# Altium PCB HLK-AX3000-KIT.PcbDoc (part 2 of 3)
Units mm, origin at the board's own origin, x right, y up, seen from the top; angles counter-clockwise.
Board outline 152 x 109 mm, 2 copper layers (Top Layer, Bottom Layer), stack 0.325 mm thick; 227 components, 273 nets, 847 pads, 829 vias.
Unrouted connection lines stored in the file: 195.
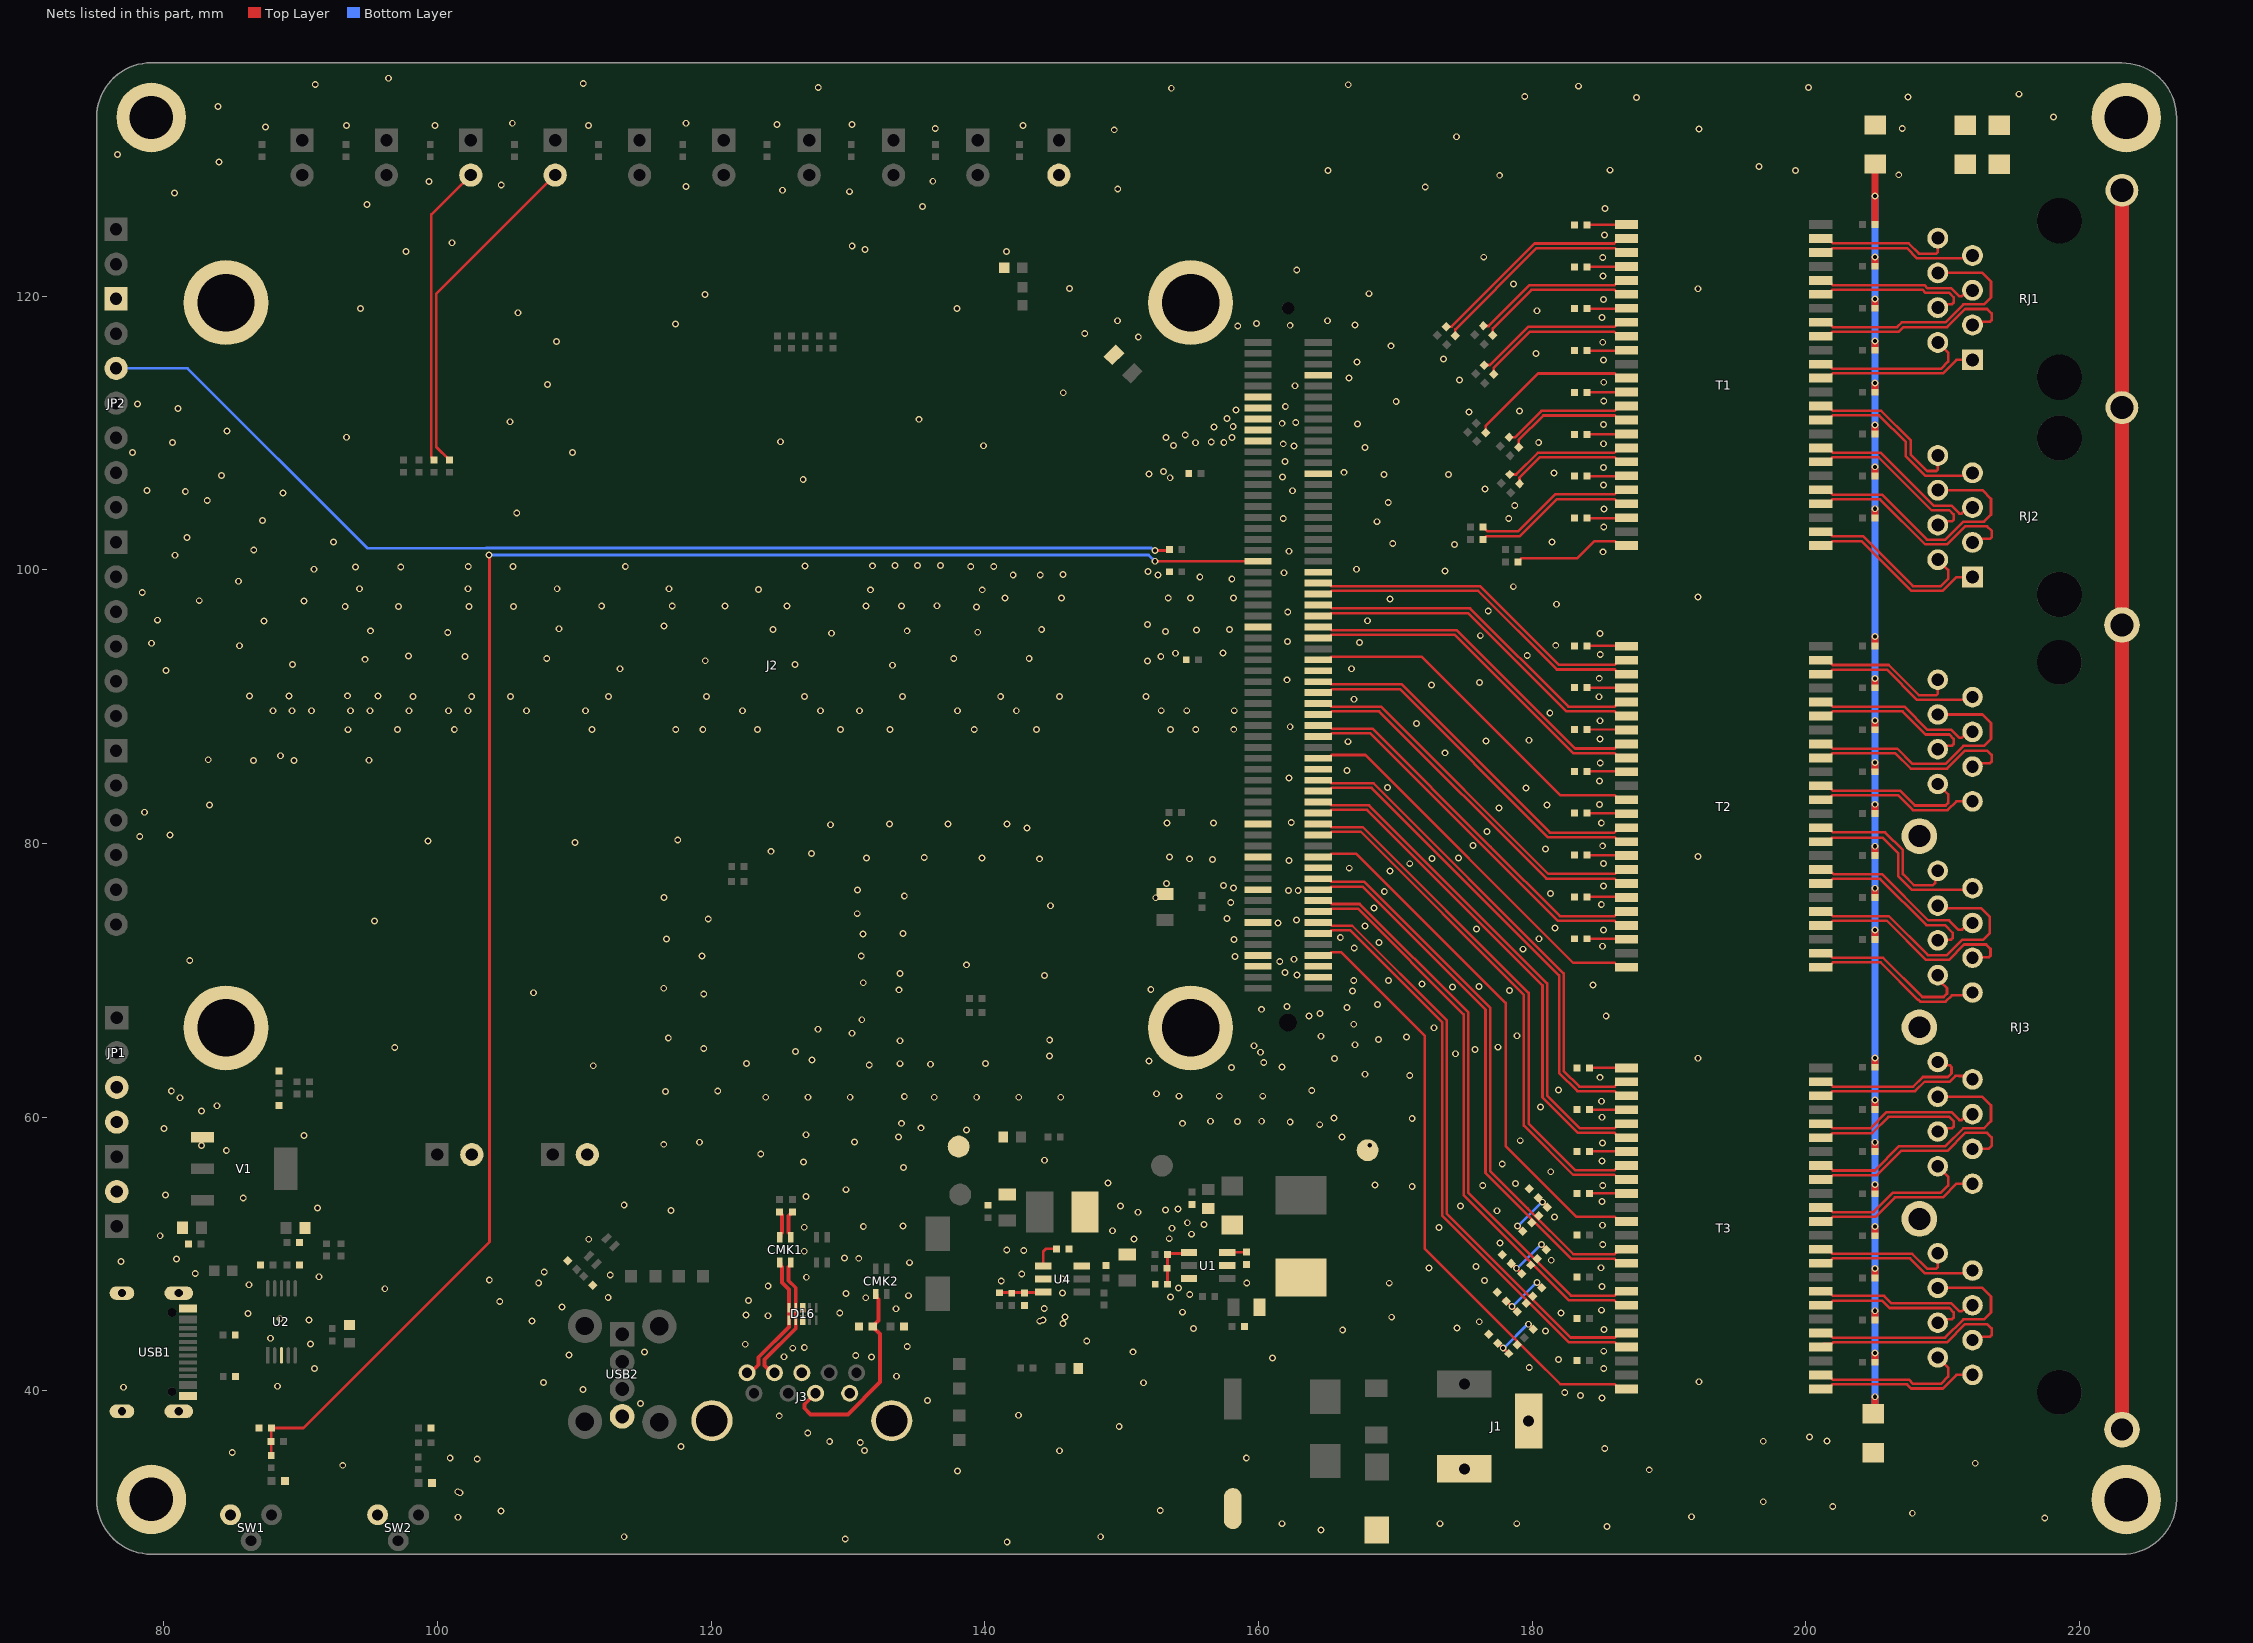
[diagram p2: the nets of this part, all layers, seen from the top]

## Via types
v1: diameter 0.5, hole 0.3, Top Layer to Bottom Layer, tented both sides, 829 vias

## Nets (pads, with @x,y where several pads share a name; then routed paths per layer and width w, separated by ;. In a path a pad name is that pad's centre, name@x,y a point inside that pad or via, vN(x,y) a via of type N, cw(c..) or ccw(c..) an arc to the next point about the centre after c; other vN are vias at no path point) (continued)
ESW_TXVN_B_P0: J2.107 R68.1 T3.20 | length 43.5
  Top Layer w0.188: J2.107@164.357,74.223 165.107,74.223 165.344,73.986 166.849,73.986 173.753,67.083 173.753,52.941 182.799,43.895 186.033,43.895 186.357,44.219 T3.20@186.887,44.219
ESW_TXVN_B_P1: J2.89 T3.8 | length 38.7
  Top Layer w0.188: J2.89@164.357,81.423 165.107,81.423 165.334,81.196 167.615,81.196 179.737,69.074 179.737,59.524 183.132,56.129 186.027,56.129 186.357,56.459 T3.8@186.887,56.459
ESW_TXVN_B_P2: J2.71 T2.20 | length 28.5
  Top Layer w0.188: J2.71@164.357,88.623 165.107,88.623 165.339,88.391 168.319,88.391 176.962,79.749 182.025,74.686 186.021,74.686 186.131,74.796 186.131,74.808 186.357,75.034 T2.20@186.887,75.034
ESW_TXVN_B_P3: J2.53 T2.8 | length 26.3
  Top Layer w0.188: J2.53@164.357,95.823 165.107,95.823 165.351,95.579 174.49,95.579 183.131,86.939 186.022,86.939 186.357,87.274 T2.8@186.887,87.274
ESW_TXVN_B_P4: R86.2 T1.20 | length 11.9
  Top Layer w0.188: R86.2@176.393,103.132 176.72,102.805 178.961,102.805 181.686,105.531 186.039,105.531 186.357,105.849 T1.20@186.887,105.849
ESW_TXVN_B_P5: R78.2 T1.8 | length 11.7
  Top Layer w0.188: R78.2@176.508,114.966 176.913,114.966 179.696,117.749 186.021,117.749 186.131,117.859 186.131,117.863 186.357,118.089 T1.8@186.887,118.089
ESW_TXVN_C_P0: J2.103 R66.1 T3.17 | length 42.3
  Top Layer w0.188: J2.103@164.357,75.823 165.107,75.823 165.354,75.576 167.393,75.576 175.328,67.641 175.328,54.459 180.237,49.549 182.835,46.951 186.029,46.951 186.357,47.279 T3.17@186.887,47.279
ESW_TXVN_C_P1: J2.85 T3.5 | length 37.3
  Top Layer w0.188: J2.85@164.357,83.023 165.107,83.023 165.34,82.79 168.078,82.79 181.093,69.775 181.093,61.582 183.49,59.186 186.024,59.186 186.357,59.519 T3.5@186.887,59.519
ESW_TXVN_C_P2: J2.67 T2.17 | length 27.8
  Top Layer w0.188: J2.67@164.357,90.223 165.107,90.223 165.334,89.996 168.948,89.996 181.173,77.771 186.034,77.771 186.357,78.094 T2.17@186.887,78.094
ESW_TXVN_C_P3: J2.49 T2.5 | length 25.8
  Top Layer w0.188: J2.49@164.357,97.423 165.107,97.423 165.351,97.179 175.456,97.179 182.641,89.994 186.021,89.994 186.131,90.104 186.131,90.108 186.357,90.334 T2.5@186.887,90.334
ESW_TXVN_C_P4: R84.2 T1.17 | length 9.3
  Top Layer w0.188: R84.2@178.365,106.965 178.818,106.965 180.406,108.553 186.001,108.553 186.357,108.909 T1.17@186.887,108.909
ESW_TXVN_C_P5: R76.2 T1.5 | length 11.8
  Top Layer w0.188: R76.2@176.439,117.818 176.654,117.818 176.66,117.823 176.663,117.82 176.819,117.82 179.804,120.805 186.021,120.805 186.131,120.915 186.131,120.923 186.357,121.149 T1.5@186.887,121.149
ESW_TXVN_D_P0: J2.99 R64.1 T3.14 | length 41
  Top Layer w0.188: J2.99@164.357,77.423 165.107,77.423 165.338,77.192 167.733,77.192 176.928,67.997 176.928,56.058 179.661,53.325 182.999,49.987 186.021,49.987 186.131,50.097 186.131,50.113 186.357,50.339 T3.14@186.887,50.339
ESW_TXVN_D_P1: J2.81 T3.2 | length 36.1
  Top Layer w0.188: J2.81@164.357,84.623 165.107,84.623 165.33,84.4 168.399,84.4 182.302,70.496 182.302,63.376 183.442,62.236 186.014,62.236 186.357,62.579 T3.2@186.887,62.579
ESW_TXVN_D_P2: J2.63 T2.14 | length 27.2
  Top Layer w0.188: J2.63@164.357,91.823 165.107,91.823 165.306,91.624 170.47,91.624 181.296,80.798 186.001,80.798 186.357,81.154 T2.14@186.887,81.154
ESW_TXVN_D_P3: J2.45 T2.2 | length 25.1
  Top Layer w0.188: J2.45@164.357,99.023 165.107,99.023 165.328,98.802 176.196,98.802 181.945,93.054 186.021,93.054 186.131,93.164 186.131,93.168 186.357,93.394 T2.2@186.887,93.394
ESW_TXVN_D_P4: R82.2 T1.14 | length 9.5
  Top Layer w0.188: R82.2@178.304,109.672 178.519,109.672 178.524,109.677 178.53,109.672 178.731,109.672 180.675,111.616 186.021,111.616 186.131,111.727 186.131,111.743 186.357,111.969 T1.14@186.887,111.969
ESW_TXVN_D_P5: R74.2 T1.2 | length 15.8
  Top Layer w0.188: R74.2@173.708,117.776 174.108,117.776 180.176,123.844 185.99,123.844 186.129,123.983 186.661,123.983 T1.2@186.887,124.209
ESW_TXVP_A_P0: J2.113 R71.2 T3.24 | length 45
  Top Layer w0.188: J2.113@164.357,71.823 165.107,71.823 165.329,72.046 166.048,72.046 172.142,65.951 172.142,50.387 180.07,42.459 182.048,40.481 186.015,40.481 186.357,40.139 T3.24@186.887,40.139
ESW_TXVP_A_P1: J2.95 T3.12 | length 39.9
  Top Layer w0.188: J2.95@164.357,79.023 165.107,79.023 165.33,79.246 167.153,79.246 178.05,68.349 178.05,57.881 183.206,52.725 186.021,52.725 186.131,52.615 186.131,52.605 186.357,52.379 T3.12@186.887,52.379
ESW_TXVP_A_P2: J2.77 T2.24 | length 29.1
  Top Layer w0.188: J2.77@164.357,86.223 165.107,86.223 165.346,86.463 167.809,86.463 182.991,71.281 186.03,71.281 186.357,70.954 T2.24@186.887,70.954
ESW_TXVP_A_P3: J2.59 T2.12 | length 27
  Top Layer w0.188: J2.59@164.357,93.423 165.107,93.423 165.337,93.653 171.922,93.653 182.045,83.53 186.021,83.53 186.357,83.194 T2.12@186.887,83.194
ESW_TXVP_A_P4: R89.2 T1.24 | length 8.7
  Top Layer w0.188: R89.2@178.956,100.577 179.112,100.733 179.228,100.849 183.293,100.849 184.519,102.076 186.051,102.076 186.357,101.769 T1.24@186.887,101.769
ESW_TXVP_A_P5: R81.2 T1.12 | length 12.5
  Top Layer w0.188: R81.2@176.594,110.02 176.594,110.512 180.427,114.345 186.022,114.345 186.357,114.009 T1.12@186.887,114.009
ESW_TXVP_B_P0: J2.109 R69.2 T3.21 | length 43.5
  Top Layer w0.188: J2.109@164.357,73.423 165.107,73.423 165.33,73.646 166.708,73.646 173.412,66.942 173.412,52.8 182.658,43.555 186.002,43.555 186.357,43.199 T3.21@186.887,43.199
ESW_TXVP_B_P1: J2.91 T3.9 | length 38.7
  Top Layer w0.188: J2.91@164.357,80.623 165.107,80.623 165.34,80.856 167.474,80.856 179.397,68.933 179.397,59.383 182.991,55.788 186.008,55.788 186.357,55.439 T3.9@186.887,55.439
ESW_TXVP_B_P2: J2.73 T2.21 | length 28.4
  Top Layer w0.188: J2.73@164.357,87.823 165.107,87.823 165.334,88.051 168.178,88.051 181.884,74.345 186.026,74.345 186.357,74.014 T2.21@186.887,74.014
ESW_TXVP_B_P3: J2.55 T2.9 | length 26.3
  Top Layer w0.188: J2.55@164.357,95.023 165.107,95.023 165.323,95.239 174.349,95.239 182.99,86.598 186.021,86.598 186.131,86.488 186.131,86.48 186.357,86.254 T2.9@186.887,86.254
ESW_TXVP_B_P4: R87.2 T1.21 | length 11.9
  Top Layer w0.188: R87.2@176.393,102.21 176.648,102.465 179.102,102.465 181.804,105.167 186.02,105.167 186.357,104.829 T1.21@186.887,104.829
ESW_TXVP_B_P5: R79.2 T1.9 | length 11.4
  Top Layer w0.188: R79.2@177.176,114.284 177.176,114.748 179.837,117.409 185.985,117.409 186.099,117.295 186.661,117.295 T1.9@186.887,117.069
ESW_TXVP_C_P0: J2.105 R67.2 T3.18 | length 42.3
  Top Layer w0.188: J2.105@164.357,75.023 165.107,75.023 165.32,75.236 167.252,75.236 174.987,67.501 174.987,54.318 182.694,46.611 186.006,46.611 186.357,46.259 T3.18@186.887,46.259
ESW_TXVP_C_P1: J2.87 T3.6 | length 37.3
  Top Layer w0.188: J2.87@164.357,82.223 165.107,82.223 165.333,82.45 167.937,82.45 180.753,69.634 180.753,61.441 183.349,58.846 186.011,58.846 186.357,58.499 T3.6@186.887,58.499
ESW_TXVP_C_P2: J2.69 T2.18 | length 27.8
  Top Layer w0.188: J2.69@164.357,89.423 165.107,89.423 165.34,89.656 168.807,89.656 181.032,77.431 186.001,77.431 186.357,77.074 T2.18@186.887,77.074
ESW_TXVP_C_P3: J2.51 T2.6 | length 25.7
  Top Layer w0.188: J2.51@164.357,96.623 165.107,96.623 165.322,96.839 175.315,96.839 182.5,89.653 186.018,89.653 186.357,89.314 T2.6@186.887,89.314
ESW_TXVP_C_P4: R85.2 T1.18 | length 9
  Top Layer w0.188: R85.2@179.072,106.274 179.072,106.737 180.547,108.213 186.034,108.213 186.357,107.889 T1.18@186.887,107.889
ESW_TXVP_C_P5: R77.2 T1.6 | length 11.6
  Top Layer w0.188: R77.2@177.124,117.127 177.124,117.644 179.945,120.464 186.022,120.464 186.357,120.129 T1.6@186.887,120.129
ESW_TXVP_D_P0: J2.101 R65.2 T3.15 | length 41
  Top Layer w0.188: J2.101@164.357,76.623 165.107,76.623 165.335,76.851 167.592,76.851 176.587,67.856 176.587,55.917 180.07,52.435 182.858,49.646 186.03,49.646 186.357,49.319 T3.15@186.887,49.319
ESW_TXVP_D_P1: J2.83 T3.3 | length 36.1
  Top Layer w0.188: J2.83@164.357,83.823 165.107,83.823 165.343,84.059 168.258,84.059 181.962,70.355 181.962,63.235 183.301,61.896 186.021,61.896 186.357,61.559 T3.3@186.887,61.559
ESW_TXVP_D_P2: J2.65 T2.15 | length 27.3
  Top Layer w0.188: J2.65@164.357,91.023 165.107,91.023 165.368,91.284 170.329,91.284 181.165,80.448 186.044,80.448 186.357,80.134 T2.15@186.887,80.134
ESW_TXVP_D_P3: J2.47 T2.3 | length 25.2
  Top Layer w0.188: J2.47@164.357,98.223 165.107,98.223 165.345,98.462 176.055,98.462 181.804,92.713 186.021,92.713 186.131,92.603 186.131,92.6 186.357,92.374 T2.3@186.887,92.374
ESW_TXVP_D_P4: R83.2 T1.15 | length 9.3
  Top Layer w0.188: R83.2@179.014,108.965 179.014,109.473 180.816,111.276 186.031,111.276 186.357,110.949 T1.15@186.887,110.949
ESW_TXVP_D_P5: R75.2 T1.3 | length 15.6
  Top Layer w0.188: R75.2@174.391,117.093 174.391,117.577 180.317,123.504 186.043,123.504 186.357,123.189 T1.3@186.887,123.189
GBE_LED0: D13.2 R24.1 | length 22.1
  Top Layer w0.2: R24.1@99.751,108.027 99.548,108.231 99.548,125.963 D13.2@102.432,128.847
GBE_LED1: D11.2 R22.1 | length 24.8
  Top Layer w0.2: R22.1@100.867,108.027 99.9,108.995 99.9,120.151 D11.2@108.596,128.847
GND: C2.1 C3.2 C4.1 C5.2 C6.1 C7.1 C9.1 C10.2 C11.1 C12.1 C13.2 C14.1 C16.2 C17.2 C18.1 C19.2 C20.2 C21.2 C22.2 C24.1 C25.2 C26.1 C28.2 C30.1 C34.2 C35.1 C36.1 C37.1 C38.1 C39.1 C40.1 C41.1 C42.1 C43.1 C44.1 C45.1 C46.1 C47.1 C48.1 C49.1 C50.1 C51.1 C52.1 C53.1 C54.1 C55.1 C56.1 C57.1 C58.1 C59.1 C60.2 D2.1 D4.2 D7.1 D12.1 D16.3 D16.8 D17.1 D18.1 D19.1 D20.1 D21.1 D22.1 J1.2 J1.3 J2.0 J2.7 J2.12 J2.14 J2.16 J2.18 J2.20 J2.25 J2.43 J2.54 J2.61 J2.79 J2.90 J2.96 J2.97 J2.102 J2.108 J2.114 J2.115 J2.116 J2.117 J3.4 J3.7 J3.10 J3.11 J5.1 J6.1 J7.1 J8.1 JP1.3 JP2.1 JP5.2 JP6.2 JP8.2 JP9.2 LED1.2 LED2.2 LED3.2 R5.2 R6.1 R12.2 R21.1 R27.1 R28.1 R44.1 R90.1 R100.2 SW1.1 SW2.1 TP6.1 TP10.1 U1.3 U2.3 U4.2 USB1.1 USB1.2 USB1.3 USB1.4 USB1.A1B12 USB1.B1A12 USB2.4 V1.1
  other v1: 141.63,28.956 129.794,29.159 113.64,29.337 148.463,29.337 164.573,29.831 185.477,30.085 161.703,30.288 173.26,30.288 178.873,30.288 217.456,30.695 101.498,30.759 191.65,30.796 207.779,31.05 104.648,31.217 152.813,31.253 201.962,31.533 196.882,31.888 101.635,32.549 101.48,32.625 138.005,34.149 188.551,34.225 93.072,34.555 212.376,34.708 102.905,35.012 159.106,35.077 100.924,35.089 84.995,35.495 131.204,35.631 145.447,35.622 185.3,35.775 117.786,35.927 130.894,36.215 128.659,36.292 196.887,36.316 201.535,36.341 200.265,36.621 127.059,36.927 149.816,37.4 124.976,38.171 142.45,38.213 114.828,39.065 135.814,39.294 185.101,39.465 183.525,39.668 182.376,39.877 110.642,40.107 77.038,40.259 88.316,40.335 151.587,40.589 107.747,40.615 192.188,40.659 133.536,41.067 91.008,41.631 185.228,41.624 179.781,41.707 181.915,42.291 161.011,42.393 131.706,42.464 125.332,42.489 130.564,42.591 109.601,42.621 115.12,42.836 150.825,42.85 185.228,42.894 125.96,43.115 126.805,43.175 134.323,43.226 90.703,43.409 122.487,43.404 147.441,43.641 87.782,43.84 180.975,44.374 166.148,44.436 185.247,44.484 155.245,44.552 174.505,44.588 145.714,44.911 176.13,45.046 106.909,45.11 144.012,45.089 90.602,45.187 144.241,45.165 88.494,45.263 169.729,45.381 145.867,45.393 124.138,45.486 122.538,45.537 86.157,45.644 129.396,45.69 182.093,45.695 154.432,45.745 185.076,45.892 133.5,46 144.343,46.003 109.093,46.126 104.546,46.533 122.715,46.604 112.471,46.812 131.294,46.798 153.568,46.867 134.418,46.951 154.972,47.047 129.846,47.103 145.663,47.146 96.146,47.458 154.159,47.504 185.101,47.619 124.163,47.671 86.233,47.752 107.391,47.879 169.552,47.865 159.138,47.885 141.193,48.035 176.505,48.057 103.784,48.108 145.673,48.163 126.951,48.297 91.338,48.336 112.624,48.463 82.296,48.565 142.692,48.543 107.798,48.692 172.447,48.983 185.025,48.99 175.902,49.084 134.494,49.364 76.86,49.454 181.388,49.541 80.924,49.632 130.785,49.682 129.751,49.703 126.798,50.202 142.844,50.245 141.599,50.296 185.152,50.692 177.648,50.8 111.049,51.079 150.908,51.091 153.473,51.116 79.731,51.333 155.099,51.446 149.333,51.7 153.677,51.878 173.184,51.929 126.798,51.954 131.116,52.005 134.012,52.056 185.147,52.098 156.013,52.158 154.794,52.285 181.617,52.691 151.187,53.047 177.419,53.162 117.069,53.188 153.194,53.224 154.108,53.275 91.237,53.365 149.917,53.504 174.759,53.504 113.64,53.569 185.101,53.842 85.801,54.102 126.925,54.19 80.112,54.305 129.846,54.698 171.228,54.926 176.384,55.002 185.152,55.01 168.51,55.028 178.791,55.143 149.003,55.18 181.356,56.007 134.063,56.323 177.807,56.577 126.746,56.718 185.101,56.788 144.348,56.845 123.623,57.314 84.563,57.568 82.76,57.923 168.129,57.949 116.535,58.014 185.127,58.109 119.151,58.166 130.481,58.177 179.127,58.279 133.68,58.547 166.091,58.547 90.246,58.649 126.925,58.711 138.665,59.066 80.017,59.168 135.338,59.219 164.472,59.447 133.91,59.549 154.439,59.549 162.313,59.651 158.452,59.676 156.496,59.701 160.23,59.701 171.228,59.905 165.506,59.944 185.101,59.989 82.753,60.452 180.601,60.743 83.871,60.833 185.076,61.157 81.178,61.417 123.984,61.454 127.083,61.454 130.156,61.454 136.303,61.454 139.402,61.454 142.475,61.454 145.549,61.454 134.112,61.519 154.185,61.53 157.131,61.53 160.306,61.53 152.534,61.708 116.662,61.874 80.543,61.9 120.479,61.911 163.887,61.937 181.921,61.987 184.949,62.91 171.05,63.054 167.774,63.13 158.02,63.638 161.703,63.664 111.379,63.754 131.553,63.816 136.024,63.867 133.807,63.906 122.587,63.918 140.037,63.918 160.382,63.994 152,64.096 127.356,64.186 165.538,64.273 192.112,64.307 144.71,64.477 174.403,64.629 160.147,64.745 126.168,64.807 175.825,64.934 119.456,65.024 96.876,65.1 177.502,65.112 159.671,65.213 167.037,65.289 133.807,65.583 144.736,65.645 168.764,65.67 116.865,65.786 170.822,65.848 164.567,65.913 178.899,65.95 130.283,66.128 127.813,66.421 172.828,66.534 166.961,66.788 131.007,67.121 185.406,67.38 163.684,67.398 164.497,67.575 160.204,67.88 166.453,68.007 162.084,68.083 168.688,68.236 119.456,68.986 107.01,69.088 166.859,69.226 178.34,69.252 133.724,69.305 152.127,69.328 116.535,69.418 174.174,69.506 176.105,69.557 184.436,69.658 171.939,69.734 131.115,69.825 166.961,69.988 169.501,69.988 144.355,70.344 162.821,70.395 133.807,70.485 161.932,70.573 138.665,71.131 161.551,71.385 81.89,71.45 162.592,71.538 158.274,71.741 119.336,71.766 130.962,71.78 179.331,72.274 166.995,72.351 185.127,72.485 168.815,72.757 158.198,72.986 116.738,73.025 180.499,73.036 165.976,73.119 131.089,73.381 134.01,73.431 185.203,73.679 175.927,73.748 181.667,73.824 167.774,73.976 161.424,74.179 95.402,74.346 162.77,74.408 119.786,74.473 157.69,74.51 130.676,74.868 168.448,75.282 144.787,75.449 185.05,75.533 157.969,75.678 116.561,76.048 152.483,76.034 134.112,76.149 181.342,76.346 169.191,76.498 162.186,76.567 162.897,76.567 130.683,76.606 158.172,76.744 185.203,76.88 157.436,76.923 153.27,77.075 169.615,77.976 166.631,78.193 171.05,78.523 185.203,78.531 162.236,78.751 156.623,78.828 143.999,78.878 154.947,78.878 172.676,78.904 131.35,78.929 139.783,78.929 174.606,78.929 135.566,78.98 153.499,79.005 192.112,79.039 127.337,79.259 124.358,79.426 180.982,79.59 185.15,79.828 175.673,79.844 110.039,80.072 99.295,80.174 117.558,80.25 78.239,80.504 80.448,80.631 176.689,80.885 143.085,81.139 128.708,81.368 133.026,81.418 137.294,81.418 141.612,81.418 153.321,81.495 156.699,81.495 185.05,81.502 162.389,81.52 78.594,82.282 177.578,82.587 83.344,82.815 181.083,82.815 184.923,82.849 179.534,84.06 169.425,84.085 184.923,84.576 162.236,84.797 166.453,85.33 184.974,85.871 86.538,86.055 89.51,86.055 94.996,86.081 83.242,86.117 88.519,86.411 173.616,86.625 166.529,87.438 176.613,87.489 179.762,87.54 184.949,87.624 93.447,88.316 97.084,88.331 101.226,88.327 111.284,88.327 117.405,88.327 119.387,88.327 123.374,88.327 129.445,88.327 133.077,88.327 139.224,88.327 143.771,88.327 153.577,88.32 155.41,88.332 158.187,88.343 162.313,88.53 171.533,88.759 184.949,88.97 181.286,89.546 87.967,89.699 89.364,89.699 90.786,89.699 93.631,89.699 95.053,89.699 97.924,89.699 100.794,89.699 102.216,89.699 106.509,89.699 110.801,89.699 122.282,89.699 127.997,89.699 130.842,89.699 138.005,89.699 142.297,89.699 152.886,89.703 154.753,89.703 158.222,89.703 166.986,90.537 184.873,90.723 98.203,90.74 102.496,90.74 105.34,90.74 112.503,90.74 119.666,90.74 126.829,90.74 133.992,90.74 141.154,90.74 145.447,90.74 151.773,90.737 86.265,90.766 89.135,90.766 95.638,90.766 93.428,90.791 172.65,91.578 176.156,91.756 162.084,91.959 184.898,92.069 80.144,92.645 113.341,92.772 166.783,92.772 133.255,93.026 89.408,93.091 126.118,93.077 151.873,93.331 119.564,93.356 94.698,93.458 107.982,93.509 137.725,93.509 143.237,93.509 102.013,93.661 152.857,93.675 97.873,93.712 179.635,93.737 184.974,93.821 153.924,93.904 157.404,93.929 85.528,94.449 181.723,94.482 79.104,94.635 167.367,94.677 162.109,94.753 176.206,95.185 184.949,95.345 128.785,95.363 100.743,95.414 139.478,95.439 153.194,95.49 95.104,95.541 134.322,95.541 155.455,95.592 124.517,95.642 144.152,95.642 157.868,95.642 108.871,95.693 116.542,95.896 151.873,95.998 87.313,96.268 167.951,96.277 79.531,96.317 162.135,96.912 176.791,96.989 139.391,97.286 93.25,97.319 97.136,97.319 102.292,97.319 105.544,97.319 111.995,97.344 117.151,97.344 121.012,97.344 125.533,97.344 131.325,97.344 133.915,97.344 136.506,97.37 181.774,97.479 90.253,97.725 82.582,97.743 169.602,97.878 141.459,97.928 145.6,97.934 153.397,97.928 155.023,97.928 158.172,97.928 192.112,98.012 78.416,98.335 131.629,98.538 139.808,98.538 123.451,98.563 94.291,98.614 102.216,98.614 108.744,98.614 116.923,98.614 178.619,98.767 85.442,99.161 158.047,99.335 155.709,99.478 152.657,99.613 142.069,99.63 144.05,99.63 145.701,99.656 161.855,99.783 151.924,99.884 173.616,99.91 90.964,100.037 167.164,100.037 94.012,100.214 97.314,100.214 102.242,100.24 105.518,100.24 113.722,100.24 138.97,100.24 140.646,100.24 126.854,100.265 131.782,100.291 133.433,100.316 135.084,100.316 136.76,100.316 80.801,101.067 185.177,101.314 162.236,101.357 86.57,101.459 174.32,101.854 169.806,101.916 92.386,102.043 181.439,102.043 81.686,102.362 185.228,103.118 168.663,103.516 87.205,103.593 161.805,103.745 178.283,103.759 105.791,104.14 185.254,104.439 178.725,104.695 169.475,104.913 83.166,105.066 88.703,105.625 81.566,105.726 162.49,105.777 78.772,105.802 176.555,105.893 185.203,106.191 126.721,106.604 153.543,106.731 161.754,106.793 84.208,106.895 169.171,106.971 173.87,106.971 151.994,107.01 181.596,107.08 166.25,107.123 153.042,107.174 185.203,107.487 161.932,107.911 77.705,108.571 109.862,108.571 167.774,108.927 139.903,109.068 162.592,109.054 153.778,109.079 161.805,109.206 185.214,109.208 155.404,109.282 80.626,109.308 157.461,109.308 180.474,109.308 156.547,109.333 125.076,109.358 153.245,109.663 158.071,109.663 93.352,109.689 154.642,109.841 84.614,110.146 156.75,110.425 158.147,110.476 185.203,110.611 167.24,110.654 161.728,110.705 162.719,110.755 105.283,110.82 135.179,110.998 157.69,111.06 175.387,111.531 179.07,111.608 158.35,111.67 81.033,111.797 161.957,111.924 78.061,112.127 170.06,112.305 185.228,112.338 145.726,112.94 162.668,113.448 108.033,113.549 185.228,113.71 174.682,113.88 166.605,114.007 167.189,115.175 185.203,115.335 173.507,115.418 180.27,115.81 169.679,116.369 185.152,116.631 108.693,116.674 151.213,117.004 147.301,117.258 158.477,117.817 162.313,117.867 167.037,117.893 117.38,117.969 159.849,117.994 149.689,118.198 165.03,118.198 185.101,118.434 105.874,118.782 180.347,118.934 94.361,119.101 137.973,119.101 185.203,119.755 119.539,120.128 168.078,120.179 192.112,120.542 146.184,120.56 178.645,120.89 185.177,121.482 162.795,121.906 185.152,122.828 176.46,122.846 97.688,123.266 141.569,123.257 131.246,123.42 130.302,123.673 101.067,123.901 185.279,124.479 185.33,126.41 135.439,126.554 94.844,126.695 80.779,127.545 130.103,127.633 125.201,127.734 149.712,127.836 172.187,127.965 118.165,128.014 104.652,128.115 99.369,128.369 136.195,128.397 177.622,128.829 206.788,128.866 165.075,129.184 199.244,129.17 185.685,129.204 196.577,129.475 84.03,129.805 76.613,130.339 174.473,131.648 149.458,132.154 192.188,132.226 136.377,132.256 207.042,132.244 87.431,132.357 93.349,132.459 99.826,132.459 111.028,132.459 142.778,132.459 124.82,132.535 130.281,132.535 105.465,132.637 118.165,132.637 218.091,133.082 83.954,133.869 187.616,134.512 207.474,134.555 179.451,134.595 215.576,134.758 153.626,135.19 127.819,135.241 200.184,135.241 183.395,135.343 166.554,135.444 91.066,135.47 110.649,135.546 96.425,135.927
GND_EARTH: C40.2 R44.2 RJ1.0 RJ2.0 RJ3.EH | length 90.6
  Top Layer w1: RJ3.EH@223.1,37.162 RJ3.EH@223.1,95.972 RJ1.0@223.1,111.852 RJ1.0@223.1,127.732
GPIO_RESET: C26.2 J2.42 R16.2 R19.2 | length 130.2
  Top Layer w0.2: R19.2@87.85,35.271 87.85,36.285 87.85,37.338 C26.2@87.905,37.393 ; C26.2@88.011,37.287 90.195,37.287 103.797,50.889 103.797,101.048 v1(103.763,101.083) ; v1(152.426,100.623) J2.42@159.957,100.623
  Bottom Layer w0.2: v1(103.763,101.083) 151.967,101.083 v1(152.426,100.623)
GPIO_WPS: JP2.3 R18.1 | length 82.4
  Top Layer w0.2: v1(152.426,101.419) 152.435,101.41 R18.1@153.391,101.41
  Bottom Layer w0.2: JP2.3@76.508,114.721 81.732,114.721 94.876,101.577 103.547,101.577 103.555,101.585 152.179,101.585 152.345,101.419 v1(152.426,101.419)
MTXVN_A_P0: RJ3.A2 T3.26 | length 11.4
  Top Layer w0.188: T3.26@201.087,41.159 201.617,41.159 201.843,40.933 201.843,40.92 201.953,40.81 207.531,40.81 207.83,40.511 209.868,40.511 210.389,41.032 210.389,41.688 209.922,42.155 RJ3.A2@209.922,42.437
MTXVN_A_P1: RJ3.B2 T3.38 | length 11.8
  Top Layer w0.188: T3.38@201.087,53.399 201.617,53.399 201.962,53.054 204.94,53.054 206.366,54.481 209.868,54.481 210.389,55.002 210.389,55.658 209.922,56.125 RJ3.B2@209.922,56.407
MTXVN_A_P2: RJ3.C2 T2.26 | length 12
  Top Layer w0.188: T2.26@201.087,71.974 201.617,71.974 201.944,71.647 205.65,71.647 208.515,68.782 210.064,68.782 210.311,69.029 210.311,69.425 209.844,69.892 RJ3.C2@209.844,70.174
MTXVN_A_P3: RJ3.D2 T2.38 | length 11.6
  Top Layer w0.188: T2.38@201.087,84.214 201.617,84.214 201.843,83.988 201.843,83.978 201.953,83.868 206.866,83.868 207.961,82.772 210.219,82.772 210.389,82.942 210.389,83.598 209.922,84.065 RJ3.D2@209.922,84.347
MTXVN_A_P4: RJ2.2 T1.26 | length 12.8
  Top Layer w0.188: T1.26@201.087,102.789 201.617,102.789 201.843,102.563 201.843,102.547 201.953,102.437 204.204,102.437 207.83,98.811 209.868,98.811 210.389,99.332 210.389,99.988 209.922,100.455 RJ2.2@209.922,100.737
MTXVN_A_P5: RJ1.2 T1.38 | length 11.3
  Top Layer w0.188: T1.38@201.087,115.029 201.617,115.029 201.843,114.803 201.843,114.801 201.953,114.691 209.868,114.691 210.389,115.212 210.389,115.868 209.922,116.335 RJ1.2@209.922,116.617
MTXVN_B_P0: RJ3.A6 T3.29 | length 18.7
  Top Layer w0.188: T3.29@201.087,44.219 201.617,44.219 201.95,43.886 210.17,43.886 211.502,45.219 213.016,45.219 213.531,45.734 213.531,46.888 212.902,47.517 RJ3.A6@209.64,47.517
MTXVN_B_P1: RJ3.B6 T3.41 | length 19.4
  Top Layer w0.188: T3.41@201.087,56.459 201.617,56.459 201.974,56.102 205.041,56.102 206.818,57.879 210.192,57.879 211.502,59.189 213.016,59.189 213.531,59.704 213.531,60.858 212.902,61.487 RJ3.B6@209.64,61.487
MTXVN_B_P2: RJ3.C6 T2.29 | length 19.7
  Top Layer w0.188: T2.29@201.087,75.034 201.617,75.034 201.843,74.808 201.843,74.803 201.953,74.693 206.057,74.693 208.911,71.839 210.307,71.839 211.424,72.956 212.937,72.956 213.453,73.471 213.453,74.625 212.824,75.254 RJ3.C6@209.561,75.254
MTXVN_B_P3: RJ3.D6 T2.41 | length 19.1
  Top Layer w0.188: T2.41@201.087,87.274 201.617,87.274 201.843,87.048 201.843,87.033 201.953,86.923 206.684,86.923 207.788,85.819 210.192,85.819 211.502,87.129 213.016,87.129 213.531,87.644 213.531,88.798 212.902,89.427 RJ3.D6@209.64,89.427
MTXVN_B_P4: RJ2.6 T1.29 | length 20
  Top Layer w0.188: T1.29@201.087,105.849 201.617,105.849 201.843,105.623 201.843,105.6 201.953,105.49 205.568,105.49 205.985,105.074 ; 205.986,105.074 208.85,102.209 210.193,102.209 211.502,103.519 213.016,103.519 213.531,104.034 213.531,105.188 212.902,105.817 RJ2.6@209.64,105.817
MTXVN_B_P5: RJ1.6 T1.41 | length 18.8
  Top Layer w0.188: T1.41@201.087,118.089 201.617,118.089 201.965,117.741 204.871,117.741 206.659,117.741 207.007,118.089 210.193,118.089 211.502,119.399 213.016,119.399 213.531,119.914 213.531,121.068 212.902,121.697 RJ1.6@209.64,121.697
MTXVN_C_P0: RJ3.A5 T3.32 | length 11.7
  Top Layer w0.188: T3.32@201.087,47.279 201.617,47.279 201.963,46.933 205.716,46.933 206.255,46.393 210.627,46.393 211.214,45.806 211.377,45.806 211.818,46.247 RJ3.A5@211.998,46.247
MTXVN_C_P1: RJ3.B5 T3.44 | length 12
  Top Layer w0.188: T3.44@201.087,59.519 201.617,59.519 201.843,59.293 201.843,59.286 201.953,59.176 204.708,59.176 205.896,60.363 210.627,60.363 211.214,59.776 211.377,59.776 211.818,60.217 RJ3.B5@211.998,60.217
MTXVN_C_P2: RJ3.C5 T2.32 | length 12.8
  Top Layer w0.188: T2.32@201.087,78.094 201.313,77.868 201.918,77.868 202.035,77.752 205.565,77.752 208.942,74.375 210.462,74.375 211.13,73.707 211.414,73.707 211.691,73.984 RJ3.C5@211.92,73.984
MTXVN_C_P3: RJ3.D5 T2.44 | length 12.2
  Top Layer w0.188: T2.44@201.087,90.334 201.617,90.334 201.843,90.108 201.843,90.106 201.953,89.996 207.201,89.996 208.894,88.303 210.627,88.303 211.214,87.716 211.377,87.716 211.818,88.157 RJ3.D5@211.998,88.157
MTXVN_C_P4: RJ2.5 T1.32 | length 13.1
  Top Layer w0.188: T1.32@201.087,108.909 201.617,108.909 201.97,108.556 205.467,108.556 209.33,104.693 210.627,104.693 211.214,104.106 211.377,104.106 211.818,104.547 RJ2.5@211.998,104.547
MTXVN_C_P5: RJ1.5 T1.44 | length 11.6
  Top Layer w0.188: T1.44@201.087,121.149 201.617,121.149 201.843,120.923 201.843,120.92 201.953,120.81 208.658,120.81 208.894,120.573 210.627,120.573 211.214,119.986 211.377,119.986 211.818,120.427 RJ1.5@211.998,120.427
MTXVN_D_P0: RJ3.A8 T3.35 | length 10.2
  Top Layer w0.188: T3.35@201.087,50.339 201.617,50.339 201.94,50.016 207.762,50.016 208.855,48.923 209.53,48.923 209.64,49.033 RJ3.A8@209.64,50.057
MTXVN_D_P1: RJ3.B8 T3.47 | length 11.7
  Top Layer w0.188: T3.47@201.087,62.579 201.313,62.353 201.863,62.353 201.982,62.234 207.846,62.234 208.547,62.935 210.375,62.935 210.64,63.199 210.64,63.666 210.53,63.776 209.891,63.776 RJ3.B8@209.64,64.027
MTXVN_D_P2: RJ3.C8 T2.35 | length 11.9
  Top Layer w0.188: T2.35@201.087,81.154 201.617,81.154 201.967,80.804 205.789,80.804 207.083,79.511 207.083,77.765 207.901,76.947 209.282,76.947 209.444,77.109 209.444,77.677 RJ3.C8@209.561,77.794
MTXVN_D_P3: RJ3.D8 T2.47 | length 10.7
  Top Layer w0.188: T2.47@201.087,93.394 201.617,93.394 201.843,93.168 201.843,93.154 201.953,93.044 206.055,93.044 208.267,90.833 209.53,90.833 209.64,90.943 RJ3.D8@209.64,91.967
MTXVN_D_P4: RJ2.8 T1.35 | length 12.2
  Top Layer w0.188: T1.35@201.087,111.969 201.617,111.969 201.843,111.743 201.843,111.734 201.953,111.624 205.499,111.624 207.652,109.471 207.652,108.426 208.855,107.223 209.53,107.223 209.64,107.333 RJ2.8@209.64,108.357
MTXVN_D_P5: RJ1.8 T1.47 | length 10.1
  Top Layer w0.188: T1.47@201.087,124.209 201.617,124.209 201.974,123.853 207.517,123.853 208.267,123.103 209.53,123.103 209.64,123.213 RJ1.8@209.64,124.237
MTXVP_A_P0: RJ3.A1 T3.25 | length 11.8
  Top Layer w0.188: T3.25@201.087,40.139 201.617,40.139 201.948,40.47 207.39,40.47 207.689,40.171 210.009,40.171 211.005,41.167 RJ3.A1@212.18,41.167
MTXVP_A_P1: RJ3.B1 T3.37 | length 12.2
  Top Layer w0.188: T3.37@201.087,52.379 201.617,52.379 201.952,52.714 205.081,52.714 206.507,54.141 210.009,54.141 211.005,55.137 RJ3.B1@212.18,55.137
MTXVP_A_P2: RJ3.C1 T2.25 | length 12.5
  Top Layer w0.188: T2.25@201.087,70.954 201.617,70.954 201.97,71.307 205.472,71.307 208.202,68.577 208.239,68.577 208.374,68.442 210.205,68.442 210.667,68.904 RJ3.C1@212.101,68.904
MTXVP_A_P3: RJ3.D1 T2.37 | length 12
  Top Layer w0.188: T2.37@201.087,83.194 201.617,83.194 201.95,83.527 206.725,83.527 207.82,82.432 210.36,82.432 211.005,83.077 RJ3.D1@212.18,83.077
MTXVP_A_P4: RJ2.1 T1.25 | length 13.1
  Top Layer w0.188: T1.25@201.087,101.769 201.617,101.769 201.945,102.097 204.063,102.097 207.689,98.471 210.009,98.471 211.005,99.467 RJ2.1@212.18,99.467
MTXVP_A_P5: RJ1.1 T1.37 | length 11.6
  Top Layer w0.188: T1.37@201.087,114.009 201.617,114.009 201.959,114.351 210.009,114.351 211.005,115.347 RJ1.1@212.18,115.347
MTXVP_B_P0: RJ3.A3 T3.28 | length 15.3
  Top Layer w0.188: T3.28@201.087,43.199 201.313,43.425 201.888,43.425 202.009,43.546 210.311,43.546 211.643,44.879 213.248,44.879 213.569,44.557 213.569,44.073 213.459,43.963 212.79,43.963 212.535,43.707 RJ3.A3@212.18,43.707
MTXVP_B_P1: RJ3.B3 T3.40 | length 16.1
  Top Layer w0.188: T3.40@201.087,55.439 201.313,55.665 201.885,55.665 201.982,55.762 205.182,55.762 206.959,57.539 210.333,57.539 211.643,58.849 213.248,58.849 213.569,58.527 213.569,57.905 213.35,57.686 212.188,57.686 RJ3.B3@212.18,57.677
MTXVP_B_P2: RJ3.C3 T2.28 | length 16
  Top Layer w0.188: T2.28@201.087,74.014 201.617,74.014 201.956,74.353 205.916,74.353 208.77,71.498 210.448,71.498 211.565,72.615 213.17,72.615 213.491,72.294 213.491,71.81 213.381,71.7 RJ3.C3@212.357,71.7
MTXVP_B_P3: RJ3.D3 T2.40 | length 15.8
  Top Layer w0.188: T2.40@201.087,86.254 201.617,86.254 201.946,86.582 206.543,86.582 207.663,85.462 210.317,85.462 211.643,86.789 213.248,86.789 213.569,86.467 213.569,85.983 213.459,85.873 212.435,85.873 RJ3.D3@212.18,85.617
MTXVP_B_P4: RJ2.3 T1.28 | length 16.7
  Top Layer w0.188: T1.28@201.087,104.829 201.617,104.829 201.938,105.15 205.427,105.15 208.724,101.852 210.317,101.852 211.643,103.179 213.248,103.179 213.569,102.857 213.569,102.373 213.459,102.263 212.435,102.263 RJ2.3@212.18,102.007
MTXVP_B_P5: RJ1.3 T1.40 | length 15.5
  Top Layer w0.188: T1.40@201.087,117.069 201.617,117.069 201.949,117.401 206.8,117.401 207.132,117.733 210.317,117.733 211.643,119.059 213.248,119.059 213.569,118.737 213.569,118.253 213.459,118.143 212.435,118.143 RJ1.3@212.18,117.887
MTXVP_C_P0: RJ3.A4 T3.31 | length 11.9
  Top Layer w0.188: T3.31@201.087,46.259 201.313,46.485 201.882,46.485 201.989,46.593 205.575,46.593 206.114,46.053 210.486,46.053 210.8,45.739 210.8,45.343 210.69,45.233 209.895,45.233 RJ3.A4@209.64,44.977
MTXVP_C_P1: RJ3.B4 T3.43 | length 12.2
  Top Layer w0.188: T3.43@201.087,58.499 201.617,58.499 201.843,58.725 201.953,58.835 204.849,58.835 206.037,60.023 210.486,60.023 210.8,59.709 210.8,59.313 210.69,59.203 209.895,59.203 RJ3.B4@209.64,58.947
MTXVP_C_P2: RJ3.C4 T2.31 | length 12.8
  Top Layer w0.188: T2.31@201.087,77.074 201.617,77.074 201.954,77.411 205.424,77.411 208.801,74.035 210.163,74.035 210.722,73.476 210.722,73.08 210.612,72.97 RJ3.C4@209.817,72.97
MTXVP_C_P3: RJ3.D4 T2.43 | length 12.4
  Top Layer w0.188: T2.43@201.087,89.314 201.617,89.314 201.843,89.54 201.843,89.546 201.953,89.656 207.06,89.656 208.753,87.963 210.486,87.963 210.8,87.649 210.8,87.253 210.69,87.143 209.895,87.143 RJ3.D4@209.64,86.887
MTXVP_C_P4: RJ2.4 T1.31 | length 13.3
  Top Layer w0.188: T1.31@201.087,107.889 201.617,107.889 201.944,108.216 205.326,108.216 209.189,104.353 210.486,104.353 210.8,104.039 210.8,103.643 210.69,103.533 209.895,103.533 RJ2.4@209.64,103.277
MTXVP_C_P5: RJ1.4 T1.43 | length 11.8
  Top Layer w0.188: T1.43@201.087,120.129 201.617,120.129 201.958,120.469 208.517,120.469 208.753,120.233 210.486,120.233 210.8,119.919 210.8,119.523 210.69,119.413 209.895,119.413 RJ1.4@209.64,119.157
MTXVP_D_P0: RJ3.A7 T3.34 | length 11.8
  Top Layer w0.188: T3.34@201.087,49.319 201.617,49.319 201.843,49.545 201.843,49.566 201.953,49.676 207.621,49.676 208.714,48.583 211.975,48.583 RJ3.A7@212.18,48.787
MTXVP_D_P1: RJ3.B7 T3.46 | length 12.1
  Top Layer w0.188: T3.46@201.087,61.559 201.617,61.559 201.952,61.893 207.987,61.893 208.688,62.594 210.516,62.594 210.933,63.011 211.195,63.011 211.198,63.008 211.929,63.008 RJ3.B7@212.18,62.757 RJ3.B7@211.975,62.553
MTXVP_D_P2: RJ3.C7 T2.34 | length 13.8
  Top Layer w0.188: T2.34@201.087,80.134 201.617,80.134 201.895,80.411 205.623,80.411 206.743,79.292 206.743,77.624 207.76,76.606 209.423,76.606 209.426,76.61 212.062,76.61 RJ3.C7@212.18,76.727
MTXVP_D_P3: RJ3.D7 T2.46 | length 12.2
  Top Layer w0.188: T2.46@201.087,92.374 201.617,92.374 201.947,92.704 205.915,92.704 208.126,90.493 211.975,90.493 RJ3.D7@212.18,90.697
MTXVP_D_P4: RJ2.7 T1.34 | length 13.8
  Top Layer w0.188: T1.34@201.087,110.949 201.617,110.949 201.951,111.283 205.358,111.283 207.311,109.33 207.311,108.285 208.714,106.883 211.975,106.883 RJ2.7@212.18,107.087
MTXVP_D_P5: RJ1.7 T1.46 | length 11.6
  Top Layer w0.188: T1.46@201.087,123.189 201.617,123.189 201.941,123.513 207.376,123.513 208.126,122.763 211.975,122.763 RJ1.7@212.18,122.967
NetC1_1: C1.1 U1.6 | length 1.4
  Top Layer w0.188: U1.6@157.718,50.105 157.733,50.119 159.117,50.119 C1.1@159.131,50.134
NetC1_2: C1.2 L1.1 U1.5
NetC8_1: C8.1 R2.2 R5.1 U1.1 | length 3.8
  Top Layer w0.2: C8.1@153.346,49.968 153.415,50.036 154.85,50.036 U1.1@154.918,50.105 ; C8.1@153.349,49.965 153.349,47.789 R5.1@153.352,47.786
NetC15_1: C15.1 U4.1 | length 2.1
  Top Layer w0.2: U4.1@144.273,49.113 144.273,50.201 144.446,50.374 C15.1@145.244,50.374
NetC15_2: C15.2 L4.1 U4.6
NetC17_1: C17.1 R64.2 R65.1 | length 4.1
  Top Layer w0.2: v1(178.918,52.045) 178.922,52.045 179.318,51.649 R65.1@179.322,51.649 ; C17.1@180.434,54.106 v1@180.757,53.784 ; v1(180.758,53.784) 181.111,53.431 R64.2@181.113,53.431
  Bottom Layer w0.2: v1(178.918,52.045) 178.968,52.045 180.708,53.784 v1(180.758,53.784)
NetC20_1: C20.1 R66.2 R67.1 | length 4.7
  Top Layer w0.2: C20.1@178.455,49.301 178.477,49.301 179.22,48.557 R67.1@179.238,48.557 ; v1(178.838,48.953) 178.842,48.953 R67.1@179.238,48.557 ; R67.1@179.242,48.557 R67.1@179.238,48.557 ; v1(180.678,50.692) 181.031,50.339 R66.2@181.033,50.339
  Bottom Layer w0.2: v1(178.838,48.953) 178.888,48.953 180.628,50.692 v1(180.678,50.692)
NetC21_1: C21.1 R68.2 R69.1 | length 4.7
  Top Layer w0.2: C21.1@177.924,46.663 C21.1@177.946,46.663 ; C21.1@178.152,46.517 178.508,46.161 178.895,45.774 R69.1@178.913,45.774 ; v1(178.513,46.17) 178.517,46.17 R69.1@178.913,45.774 ; R69.1@178.917,45.774 R69.1@178.913,45.774 ; v1(180.353,47.909) 180.706,47.556 R68.2@180.709,47.556
  Bottom Layer w0.2: v1(178.513,46.17) 178.563,46.17 180.303,47.909 v1(180.353,47.909)
NetC22_1: C22.1 R70.2 R71.1 | length 4.7
  Top Layer w0.2: C22.1@177.45,43.527 C22.1@177.472,43.527 ; C22.1@177.517,43.469 177.873,43.113 178.26,42.726 R71.1@178.278,42.726 ; v1(177.878,43.122) 177.882,43.122 R71.1@178.278,42.726 ; R71.1@178.282,42.726 R71.1@178.278,42.726 ; v1(179.718,44.861) 180.071,44.508 R70.2@180.074,44.508
  Bottom Layer w0.2: v1(177.878,43.122) 177.928,43.122 179.668,44.861 v1(179.718,44.861)
NetC23_1: C23.1 R10.2 R12.1 U4.3 | length 3.2
  Top Layer w0.2: C23.1@141.074,47.164 141.098,47.189 144.249,47.189 U4.3@144.273,47.213
NetC32_1: C32.1 CMK1.2 | length 2
  Top Layer w0.283: C32.1@124.975,53.072 125.187,52.86 125.187,51.574 125.074,51.462 125.074,51.287 CMK1.2@125.016,51.229
NetC33_1: C33.1 CMK1.1 | length 2
  Top Layer w0.283: CMK1.1@125.816,51.229 125.816,51.404 125.649,51.57 125.649,52.788 C33.1@125.933,53.072
NetC34_1: C34.1 C60.1 R38.1 R39.1 R40.1 R41.1 R42.1 R43.1 R45.1 R46.1 R47.1 R48.1 R49.1 R50.1 R51.1 R52.1 R53.1 R54.1 R55.1 R56.1 R57.1 R58.1 R59.1 R60.1 R61.1 R62.1 | length 110.1
  Top Layer w0.5: C60.1@204.913,38.325 205.04,38.452 v1(205.04,39.567) ; R38.1@205.04,125.294 v1(205.04,127.324) 205.04,129.632 C34.1@205.066,129.658 ; R62.1@205.044,42.086 v1@205.044,42.769 ; R61.1@205.044,45.166 v1@205.044,45.849 ; R60.1@205.044,48.246 v1@205.044,48.929 ; R59.1@205.044,51.326 v1@205.044,52.009 ; R58.1@205.044,54.406 v1@205.044,55.089 ; R57.1@205.044,57.486 v1@205.044,58.169 ; R56.1@205.044,60.566 v1@205.044,61.249 ; R55.1@205.044,63.646 v1@205.044,64.329 ; R54.1@205.044,72.983 v1@205.044,73.666 ; R53.1@205.044,76.048 v1@205.044,76.731 ; R52.1@205.044,79.114 v1@205.044,79.797 ; R51.1@205.044,82.179 v1@205.044,82.862 ; R50.1@205.044,85.245 v1@205.044,85.928 ; R49.1@205.044,88.31 v1@205.044,88.993 ; R48.1@205.044,91.376 v1@205.044,92.059 ; R47.1@205.044,94.441 v1@205.044,95.124 ; R46.1@205.044,103.778 v1@205.044,104.462 ; R45.1@205.044,106.845 v1@205.044,107.529 ; R43.1@205.044,109.912 v1@205.044,110.595 ; R42.1@205.044,112.979 v1@205.044,113.662 ; R41.1@205.044,116.046 v1@205.044,116.729 ; R40.1@205.044,119.113 v1@205.044,119.796 ; R39.1@205.044,122.18 v1@205.044,122.863
  Bottom Layer w0.5: 205.04,38.576 v1(205.04,39.567) v1(205.04,42.767) 205.044,42.771 205.044,92.057 205.044,127.32 v1(205.04,127.324)
  other v1: 205.04,45.847 205.04,48.927 205.04,52.007 205.04,55.087 205.04,58.167 205.04,61.247 205.04,64.327 205.04,73.664 205.04,76.73 205.04,79.795 205.04,82.86 205.04,85.926 205.04,88.991 205.04,92.057 205.04,95.122 205.04,104.46 205.04,107.527 205.04,110.594 205.04,113.661 205.04,116.727 205.04,119.794 205.04,122.861
NetC35_2: C35.2 T1.1 | length 2.9
  Top Layer w0.181: C35.2@184.009,125.201 186.859,125.201 T1.1@186.887,125.229
NetC36_2: C36.2 T1.4 | length 2.9
  Top Layer w0.181: C36.2@184.009,122.142 186.86,122.142 T1.4@186.887,122.169
NetC37_2: C37.2 T1.7 | length 2.9
  Top Layer w0.181: C37.2@184.009,119.082 186.86,119.082 T1.7@186.887,119.109
NetC38_2: C38.2 T1.10 | length 2.9
  Top Layer w0.181: C38.2@184.009,116.022 186.86,116.022 T1.10@186.887,116.049
NetC39_2: C39.2 T1.13 | length 2.9
  Top Layer w0.181: C39.2@184.009,112.962 186.86,112.962 T1.13@186.887,112.989
NetC41_2: C41.2 T1.16 | length 2.9
  Top Layer w0.181: C41.2@184.009,109.902 186.86,109.902 T1.16@186.887,109.929
NetC42_2: C42.2 T1.19 | length 2.9
  Top Layer w0.181: C42.2@184.009,106.842 186.86,106.842 T1.19@186.887,106.869
NetC43_2: C43.2 T1.22 | length 2.9
  Top Layer w0.181: C43.2@184.009,103.783 186.861,103.783 T1.22@186.887,103.809
NetC44_2: C44.2 T2.1 | length 2.9
  Top Layer w0.181: C44.2@184.009,94.445 186.856,94.445 T2.1@186.887,94.414
NetC45_2: C45.2 T2.4 | length 2.9
  Top Layer w0.181: C45.2@184.009,91.387 186.855,91.387 T2.4@186.887,91.354
NetC46_2: C46.2 T2.7 | length 2.9
  Top Layer w0.181: C46.2@184.009,88.328 186.853,88.328 T2.7@186.887,88.294
NetC47_2: C47.2 T2.10 | length 2.9
  Top Layer w0.181: C47.2@184.009,85.27 186.851,85.27 T2.10@186.887,85.234
NetC48_2: C48.2 T2.13 | length 2.9
  Top Layer w0.181: C48.2@184.009,82.212 186.85,82.212 T2.13@186.887,82.174
NetC49_2: C49.2 T2.16 | length 2.9
  Top Layer w0.181: C49.2@184.009,79.154 186.848,79.154 T2.16@186.887,79.114
NetC50_2: C50.2 T2.19 | length 2.9
  Top Layer w0.181: C50.2@184.009,76.095 186.846,76.095 T2.19@186.887,76.054
NetC51_2: C51.2 T2.22 | length 2.9
  Top Layer w0.181: C51.2@184.009,73.037 186.845,73.037 T2.22@186.887,72.994
NetC52_2: C52.2 T3.1 | length 2.7
  Top Layer w0.181: C52.2@184.178,63.6 186.886,63.6 T3.1@186.887,63.599
NetC53_2: C53.2 T3.4 | length 2.7
  Top Layer w0.181: C53.2@184.178,60.545 186.881,60.545 T3.4@186.887,60.539
NetC54_2: C54.2 T3.7 | length 2.7
  Top Layer w0.181: C54.2@184.178,57.49 186.876,57.49 T3.7@186.887,57.479
NetC55_2: C55.2 T3.10 | length 2.7
  Top Layer w0.181: C55.2@184.178,54.435 186.872,54.435 T3.10@186.887,54.419
NetCMK1_3: CMK1.3 D16.5 D16.6 J3.9 | length 9.8
  Top Layer w0.283: J3.9@122.623,41.32 122.884,41.32 123.468,41.903 123.468,42.454 125.678,44.664 D16.6@125.678,45.163 D16.5@125.678,46.063 125.678,47.411 125.184,47.905 125.184,49.035 125.074,49.145 125.074,49.32 CMK1.3@125.016,49.378
NetCMK1_4: CMK1.4 D16.4 D16.7 J3.8 | length 9.7
  Top Layer w0.283: J3.8@124.623,41.32 124.435,41.32 123.904,41.851 123.904,42.274 126.178,44.548 D16.7@126.178,45.163 D16.4@126.178,46.063 126.178,47.527 125.662,48.043 125.662,49.05 125.816,49.204 CMK1.4@125.816,49.378
NetCMK2_1: CMK2.1 D17.2 J3.3 | length 15
  Top Layer w0.283: J3.3@127.623,39.82 126.823,39.02 126.823,38.722 127.265,38.28 129.989,38.28 132.339,40.63 132.339,44.157 D17.2@131.801,44.695 132.236,45.13 132.236,46.693 132.095,46.834 132.095,47.009 CMK2.1@132.037,47.067